# EAGLE board Ej2_EM (EAGLE 9.7.0)

Size 136.75 x 112.72 mm. Coordinates in mm from the lower left corner, seen from the top.
Outline: 0,0 136.75,0 136.75,112.72 0,112.72 0,0
Copper layers (1*16): Top 0.035mm / dielectric 1.5mm / Bottom 0.035mm
Design rules "default": minimum track width 6mil, minimum drill 0.35mm, track to track 6mil, track to pad 6mil, pad to pad 6mil, via to via 6mil, smd to smd 6mil, copper to edge 40mil, drill to drill 6mil, minimum pad ring 10mil, minimum via ring 8mil, stop-mask expansion 4mil, vias tented up to drill 0mil, thermal gap 10mil

## Footprints (pad centres in the part's own frame; a part is rotated, then mirrored left to right if it is on the bottom)
BATTERY-GENERIC = drill 1.118 pad 3.15 octagon: + 2.54,0; - -2.54,0
RESAD1016W63L850D250B = drill 0.83 pad 1.43: 1 -5.08,0; 2 5.08,0

## Placement (x,y rotation side)
P1  BATTERYGENERIC  [BATTERY-GENERIC]  8.26,43.51 180 top
P2  BATTERYGENERIC  [BATTERY-GENERIC]  49.05,104.46 180 top
R1  10  [RESAD1016W63L850D250B]  99.93,70.92 90 top
R2  10  [RESAD1016W63L850D250B]  105.01,70.92 90 top
R3  10  [RESAD1016W63L850D250B]  110.09,70.92 90 top
R4  10  [RESAD1016W63L850D250B]  107.46,21.57 0 top
R5  10  [RESAD1016W63L850D250B]  127.78,21.57 0 top
R6  10  [RESAD1016W63L850D250B]  97.3,6.33 0 top
R7  10  [RESAD1016W63L850D250B]  117.62,6.33 0 top
R8  10  [RESAD1016W63L850D250B]  115.17,70.92 90 top

## Library data of the parts
P1 P2 R1-R8 = Tinkercad

## Nets
P1+: P1.+ R6.1
P1-: P1.- R5.2
P2+: P2.+ R1.2 R2.2 R3.2 R8.2
P2-: P2.- R1.1 R2.1 R3.1 R8.1
R4_1: R4.1 R6.2
R7_1: R4.2 R7.1

## Tracks (layer width: path | path; a pad name or v marks a point on that pad's centre or on a via)
P1+  (1 unrouted)
P1-  (1 unrouted)
P2+  (4 unrouted)
P2-  (4 unrouted)
R4_1  (1 unrouted)
R7_1  (1 unrouted)